# Altium PCB OldMCUBoard.PcbDoc
Units mm, origin at the board's own origin, x right, y up, seen from the top; angles counter-clockwise.
Board outline 47.6 x 56 mm, 2 copper layers (Top Layer, Bottom Layer); 55 components, 75 nets, 209 pads, 137 vias.
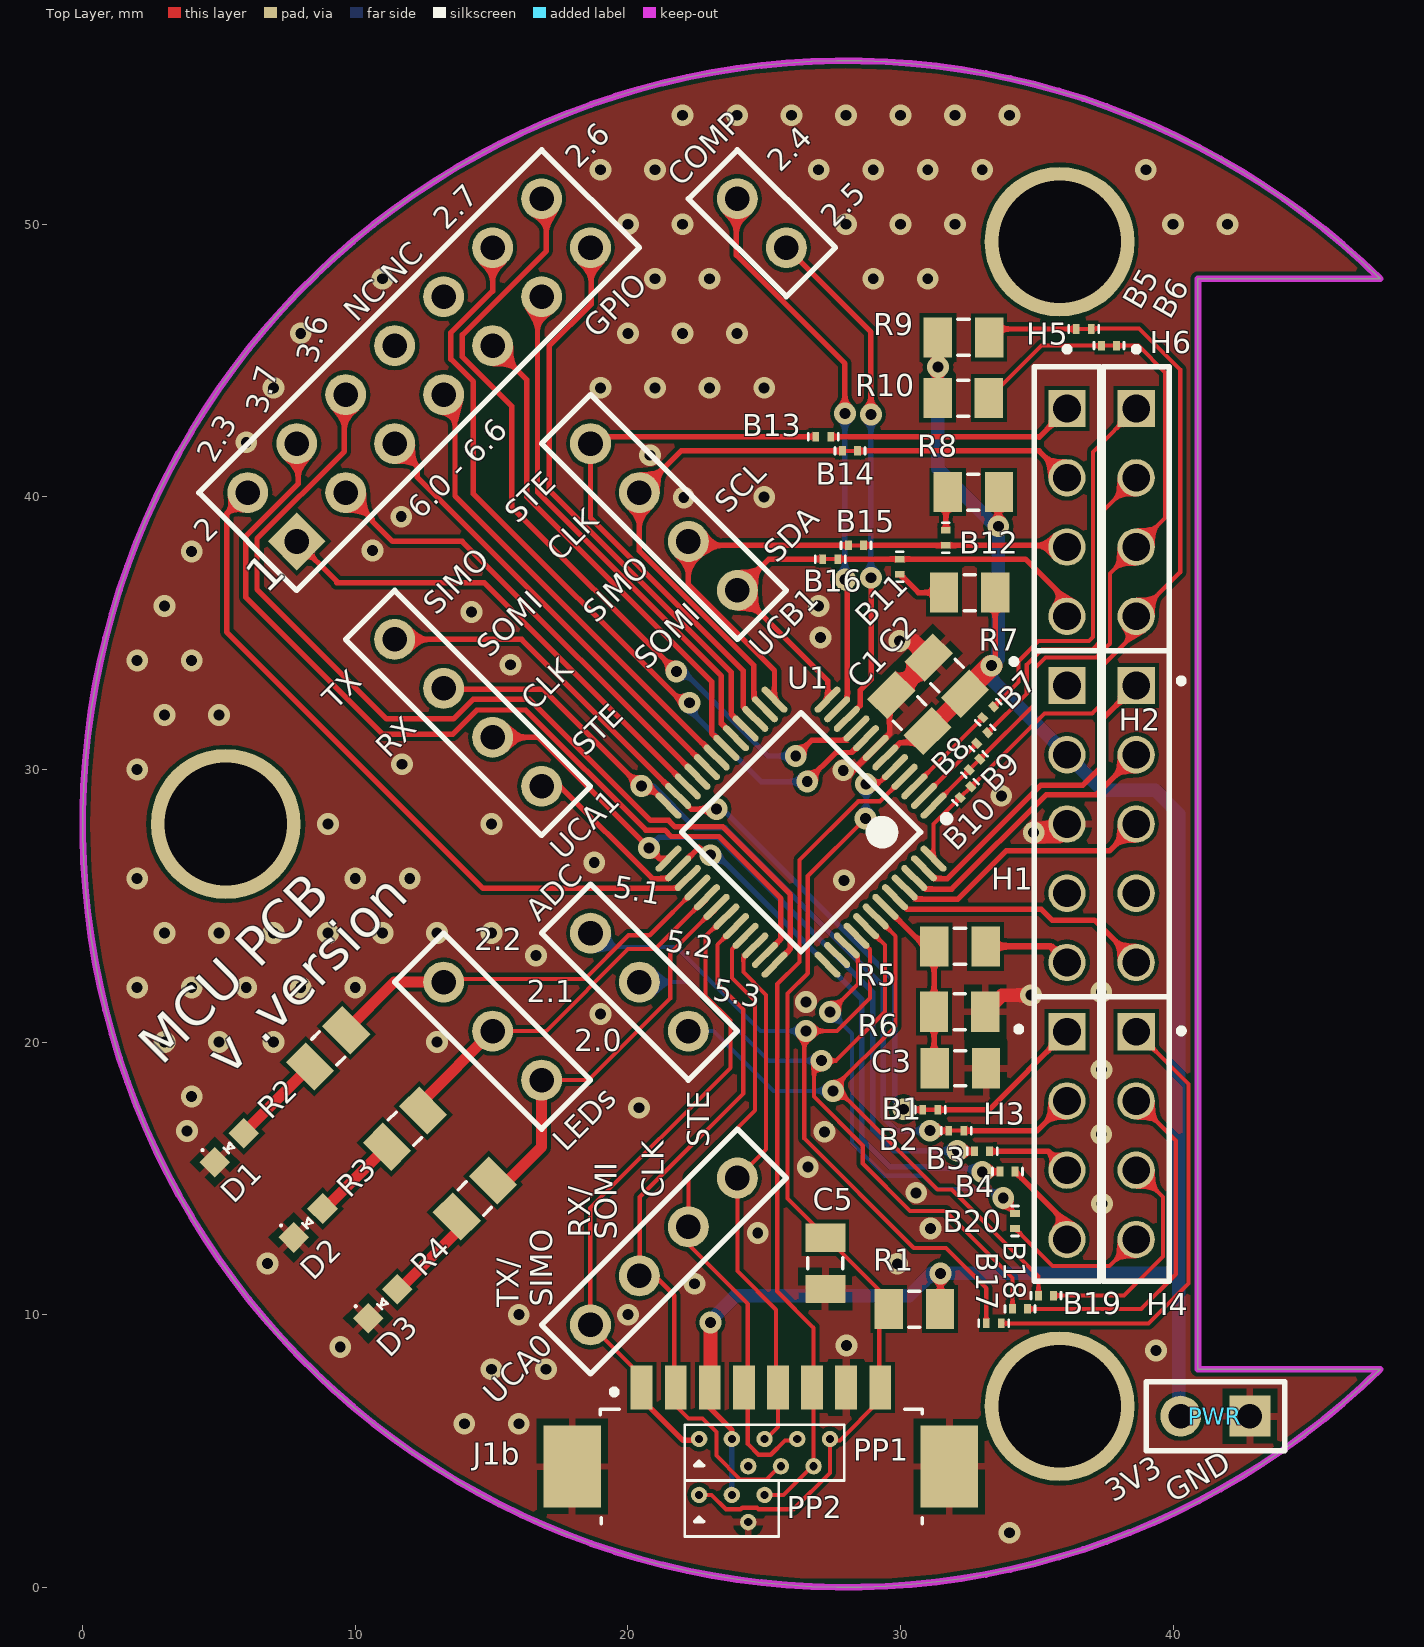
[diagram p0: Top Layer view]
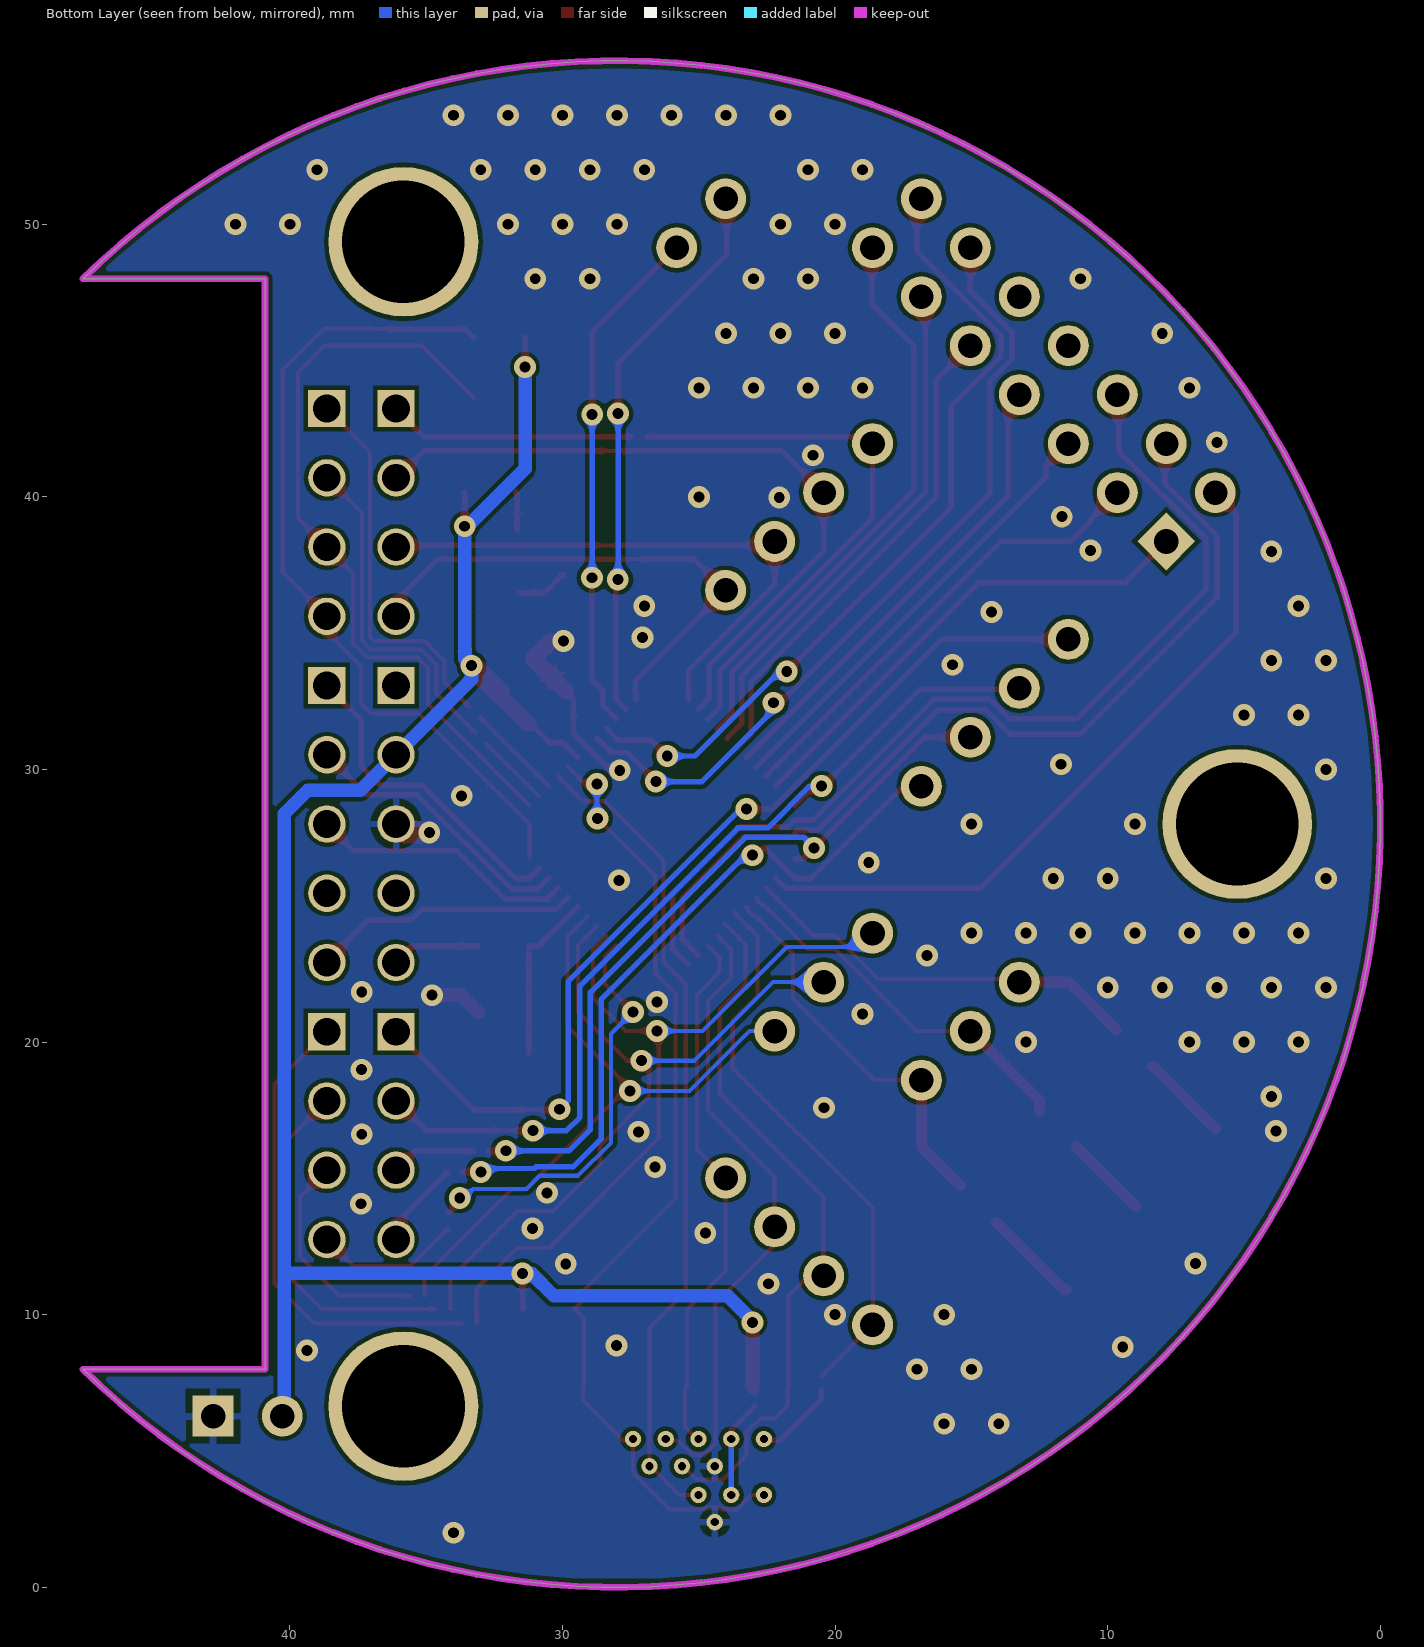
[diagram p1: Bottom Layer view, seen from below]

## Layer stack, top to bottom
Top Solder: solder mask 0.0102, Solder Resist, Dk 3.5
Top Layer: signal copper 0.0356
Dielectric 1: dielectric 0.32, FR-4, Dk 4.8
Bottom Layer: signal copper 0.0356
Bottom Solder: solder mask 0.0102, Solder Resist, Dk 3.5

## Board outline
47.596,8 cw(c28,28) 47.596,48 47.6,48 40.913,48 40.913,8

## Design rules (kind name [scope] priority, off if disabled: settings)
Clearance [All] p1: gap=0.152 ignorepadtopadclearanceinfootprint=FALSE except(0: Arc-Hole Track-Hole SMDPad-Hole THPad-Hole Via-Hole Fill-Hole Poly-Hole Region-Hole Text-Hole)
HoleSize [All] p1: absolutevalues=TRUE maxlimit=6.2 minlimit=0.3 maxpercent=80.000 minpercent=20.000
MinimumAnnularRing [All] p1: minimumring=0.15
MinimumSolderMaskSliver [All] p1: minsoldermaskwidth=0.1
PolygonConnect ViaConnect [IsVia] p1: connectstyle=Direct reliefconductorwidth=0.254 reliefentries=4 polygonreliefangle="90 Angle" airgapwidth=0.254
PolygonConnect [All] p2: connectstyle=Relief reliefconductorwidth=0.254 reliefentries=4 polygonreliefangle="90 Angle" airgapwidth=0.254
RoutingVias [All] p1: holewidth=0.3 width=0.6 viastyle="Through Hole" minholewidth=0.3 minwidth=0.5 maxholewidth=1 maxwidth=5
SilkToSilkClearance [All] p1: silktosilkclearance=0.1
SilkToSolderMaskClearance [IsPad] p1: minsilkscreentomaskgap=0.1 clearancetoexposedcopper=TRUE
SolderMaskExpansion [All] p1: expansion=0.051 istentingtop=FALSE
Width [All] p1: maxlimit=25.4 minlimit=0.15 preferedwidth=0.3
26 further rules are at their usual default settings.

## Components (designator, comment, footprint, x,y, rotation, side; value= is the part's Value field where it differs from the comment)
ADC "Header 3" HDR1X3 22.222,20.403 r135 top
B1 "Solder Jumper Normally Closed 0201" "SOLDER BRIDGE CLOSED 0201" 31.089,17.517 r0 top net-tie
B2 "Solder Jumper Normally Closed 0201" "SOLDER BRIDGE CLOSED 0201" 32.044,16.75 r0 top net-tie
B3 "Solder Jumper Normally Open 0201" "SOLDER BRIDGE OPEN 0201" 32.995,15.99 r0 top
B4 "Solder Jumper Normally Open 0201" "SOLDER BRIDGE OPEN 0201" 33.929,15.253 r0 top
B5 "Solder Jumper Normally Closed 0201" "SOLDER BRIDGE CLOSED 0201" 36.726,46.158 r180 top net-tie
B6 "Solder Jumper Normally Closed 0201" "SOLDER BRIDGE CLOSED 0201" 37.652,45.547 r0 top net-tie
B7 "Solder Jumper Normally Open 0201" "SOLDER BRIDGE OPEN 0201" 33.217,32.101 r225 top
B8 "Solder Jumper Normally Open 0201" "SOLDER BRIDGE OPEN 0201" 32.998,31.153 r225 top
B9 "Solder Jumper Normally Closed 0201" "SOLDER BRIDGE CLOSED 0201" 32.714,30.183 r225 top net-tie
B10 "Solder Jumper Normally Closed 0201" "SOLDER BRIDGE CLOSED 0201" 32.385,29.169 r45 top net-tie
B11 "Solder Jumper Normally Open 0201" "SOLDER BRIDGE OPEN 0201" 29.979,37.438 r270 top
B12 "Solder Jumper Normally Open 0201" "SOLDER BRIDGE OPEN 0201" 31.668,38.5 r270 top
B13 "Solder Jumper Normally Open 0201" "SOLDER BRIDGE OPEN 0201" 27.168,42.21 r0 top
B14 "Solder Jumper Normally Closed 0201" "SOLDER BRIDGE CLOSED 0201" 28.147,41.684 r0 top net-tie
B15 "Solder Jumper Normally Closed 0201" "SOLDER BRIDGE CLOSED 0201" 28.372,38.222 r0 top net-tie
B16 "Solder Jumper Normally Closed 0201" "SOLDER BRIDGE CLOSED 0201" 27.425,37.72 r0 top net-tie
B17 "Solder Jumper Normally Open 0201" "SOLDER BRIDGE OPEN 0201" 33.423,9.683 r0 top
B18 "Solder Jumper Normally Open 0201" "SOLDER BRIDGE OPEN 0201" 34.388,10.212 r0 top
B19 "Solder Jumper Normally Open 0201" "SOLDER BRIDGE OPEN 0201" 35.341,10.703 r0 top
B20 "Solder Jumper Normally Open 0201" "SOLDER BRIDGE OPEN 0201" 34.202,13.437 r270 top
C1 "100nF" CAPACITOR_0805_2012M-70N 30.326,32.071 r315 top
C2 "22uF" CAPACITOR_0805_2012M-70N 31.705,33.443 r315 top
C3 "100nF" CAPACITOR_0805_2012M-70N 32.198,19.041 r180 top
C5 "1nF" CAPACITOR_0805_2012M-70N 27.242,11.884 r90 top
COMP "Header 2" HDR1X2#1 25.814,49.139 r135 top
D1 "LTST-C190 Series" LED_0603_1608M_0.80MM 5.382,16.124 r45 top
D2 "LTST-C190 Series" LED_0603_1608M_0.80MM 8.268,13.364 r45 top
D3 "LTST-C190 Series" LED_0603_1608M_0.80MM 11.005,10.398 r45 top
GPIO "Header 7X2" HDR2X7 7.853,38.363 r45 top locked
H1 "SSQ-105-03-S-S" SAMTEC_SSQ-105-03-S-S 36.107,28 r270 top
H2 "SSQ-105-03-S-S" SAMTEC_SSQ-105-03-S-S 38.647,28 r270 top
H3 "SSQ-104-02-S-S" *SAMTEC_SSQ-104-02-S-S_SSQ-104-02-S-S(Primary) 36.107,16.57 r270 top
H4 "SSQ-104-02-S-S" *SAMTEC_SSQ-104-02-S-S_SSQ-104-02-S-S(Primary) 38.647,16.57 r270 top
H5 "SSQ-104-02-S-S" *SAMTEC_SSQ-104-02-S-S_SSQ-104-02-S-S(Primary) 36.107,39.43 r270 top
H6 "SSQ-104-02-S-S" *SAMTEC_SSQ-104-02-S-S_SSQ-104-02-S-S(Primary) 38.647,39.43 r270 top
J1b "0532610871" MOLEX_0532610871 25.505,4.931 r0 top
LEDs "Header 3" HDR1X3 13.241,22.199 r315 top
PP1 "Headerless Pogo Holes 8-pin" POGO_8_PIN_HEADER 25.015,4.941 r0 top
PP2 "Headerless Pogo Holes 4-pin" POGO_4_PIN_HEADER 23.815,2.891 r0 top
PWR "" HDR1X2#2 42.82,6.278 r180 top
R1 "47k" RESISTOR_0805_2012M-50N 30.51,10.203 r0 top
R2 "1K" RESISTOR_0805_2012M-50N 9.005,19.772 r225 top value=1k
R3 "1K" RESISTOR_0805_2012M-50N 11.826,16.823 r225 top value=1k
R4 "1K" RESISTOR_0805_2012M-50N 14.386,14.263 r225 top value=1k
R5 "47k" RESISTOR_0805_2012M-50N 32.183,23.513 r0 top
R6 "47k" RESISTOR_0805_2012M-50N 32.169,21.113 r180 top
R7 "4.7k" RESISTOR_0805_2012M-50N 32.536,36.49 r0 top
R8 "4.7k" RESISTOR_0805_2012M-50N 32.672,40.174 r0 top
R9 "4.7k" RESISTOR_0805_2012M-50N 32.312,45.849 r180 top
R10 "4.7k" RESISTOR_0805_2012M-50N 32.304,43.624 r180 top
U1 "MSP430FR2355TPT" PT0048A_L 26.352,27.7 r225 top
UCA0 "Header 4" HDR1X4 24.018,15.014 r225 top
UCA1 "Header 4" HDR1X4 16.833,29.383 r135 top locked
UCB1 "Header 4" HDR1X4 18.63,41.955 r315 top

## Footprints (in the part's own frame and the unit in brackets; to place one, negate y for a bottom-side part, rotate by r counter-clockwise, add the part's x,y. Pads: shape width x height; smd on the part's side, far side on the other; paste and mask are expansions set on the pad)
*SAMTEC_SSQ-104-02-S-S_SSQ-104-02-S-S(Primary) [mm]
  rect 1.37x1.37 hole 1.02: 01(-3.81,0)
  round 1.37 hole 1.02: 02(-1.27,0) 03(1.27,0) 04(3.81,0)
  silkscreen extent -5.34,-1.87 5.34,1.2
CAPACITOR_0805_2012M-70N [mm] "Capacitor, 0805 (2012 metric), 0.7mm high, nominal pads,"
  rect 1.04x1.47 smd mask+0.051: 1(-0.94,0) 2(0.94,0)
  silkscreen extent -0.2,-0.63 0.2,0.63, body extent -1,-0.73 1,0.73, height 1.23
HDR1X2#1 [mm] "Connector; Header; 2 Position"
  round 1.5 hole 0.9: 1(0,0) 2(2.54,0)
  silkscreen extent -1.27,-1.27 3.81,1.27
HDR1X2#2 [mm] "Connector; Header; 2 Position"
  rect 1.5x1.5 hole 0.9: 1(0,0)
  round 1.5 hole 0.9: 2(2.54,0)
  silkscreen extent -1.27,-1.27 3.81,1.27
HDR1X3 [mm] "Connector; Header; 3 Position"
  round 1.5 hole 0.9: 1(0,0) 2(2.54,0) 3(5.08,0)
  silkscreen extent -1.27,-1.27 6.35,1.27
HDR1X4 [mm] "Connector; Header; 4 Position"
  round 1.5 hole 0.9: 1(0,0) 2(2.54,0) 3(5.08,0) 4(7.62,0)
  silkscreen extent -1.27,-1.27 8.89,1.27
HDR2X7 [mm] "Connector; Header; 7x2 Position"
  rect 1.5x1.5 hole 0.9: 1(0,0)
  round 1.5 hole 0.9: 2(0,2.54) 3(2.54,0) 4(2.54,2.54) 5(5.08,0) 6(5.08,2.54) 7(7.62,0) 8(7.62,2.54) 9(10.16,0) 10(10.16,2.54) 11(12.7,0) 12(12.7,2.54) 13(15.24,0) 14(15.24,2.54)
  silkscreen extent -1.27,-1.27 16.51,3.81
LED_0603_1608M_0.80MM [mm] "LED, 0603 (1608 metric), 0.8mm high"
  rect 0.8x0.8 smd mask+0.051: A(0.75,0) C(-0.75,0)
  silkscreen extent -0.79,-0.12 0.13,0.66, body extent -0.8,-0.4 0.8,0.4, height 0.8
MOLEX_0532610871 [mm] "Header - Picoblade 08-pin, SMT, RA, 3.4mm height"
  rect 0.8x1.6 smd mask+0.051: 1(-5,2.4) 2(-3.75,2.4) 3(-2.5,2.4) 4(-1.25,2.4) 5(0,2.4) 6(1.25,2.4) 7(2.5,2.4) 8(3.75,2.4)
  rect 2.1x3 smd mask+0.051: MP1(-7.55,-0.5) MP2(6.28,-0.5)
  silkscreen extent -6.52,-2.6 5.29,2.33
POGO_4_PIN_HEADER [mm] "4-pin header for pogo pins"
  round 0.6 hole 0.3 mask+0.051: 1(-1.2,0.5) 2(0,0.5) 3(0.6,-0.5) 4(1.2,0.5)
  silkscreen extent -1.73,-1.02 1.72,1.03
POGO_8_PIN_HEADER [mm] "8-pin header for pogo pins"
  round 0.6 hole 0.3 mask+0.051: 1(-2.4,0.5) 2(-1.2,0.5) 3(-0.6,-0.5) 4(0,0.5) 5(0.6,-0.5) 6(1.2,0.5) 7(1.8,-0.5) 8(2.4,0.5)
  silkscreen extent -2.93,-1.02 2.93,1.03
PT0048A_L [mm]
  oval 1.25x0.25 smd paste+0 mask+0.051: 1(-4.125,2.75) 2(-4.125,2.25) 3(-4.125,1.75) 4(-4.125,1.25) 5(-4.125,0.75) 6(-4.125,0.25) 7(-4.125,-0.25) 8(-4.125,-0.75) 9(-4.125,-1.25) 10(-4.125,-1.75) 11(-4.125,-2.25) 12(-4.125,-2.75) 25(4.125,-2.75) 26(4.125,-2.25) 27(4.125,-1.75) 28(4.125,-1.25) 29(4.125,-0.75) 30(4.125,-0.25) 31(4.125,0.25) 32(4.125,0.75) 33(4.125,1.25) 34(4.125,1.75) 35(4.125,2.25) 36(4.125,2.75)
  oval 0.25x1.25 smd paste+0 mask+0.051: 13(-2.75,-4.125) 14(-2.25,-4.125) 15(-1.75,-4.125) 16(-1.25,-4.125) 17(-0.75,-4.125) 18(-0.25,-4.125) 19(0.25,-4.125) 20(0.75,-4.125) 21(1.25,-4.125) 22(1.75,-4.125) 23(2.25,-4.125) 24(2.75,-4.125) 37(2.75,4.125) 38(2.25,4.125) 39(1.75,4.125) 40(1.25,4.125) 41(0.75,4.125) 42(0.25,4.125) 43(-0.25,4.125) 44(-0.75,4.125) 45(-1.25,4.125) 46(-1.75,4.125) 47(-2.25,4.125) 48(-2.75,4.125)
  silkscreen extent -4.25,-3.1 3.1,3.55, body extent -4.5,-4.5 4.5,4.5, height 1.6
RESISTOR_0805_2012M-50N [mm] "Resistor, 0805 (2012 metric), nominal pads"
  rect 1.04x1.47 smd mask+0.051: 1(-0.94,0) 2(0.94,0)
  silkscreen extent -0.2,-0.66 0.2,0.66, body extent -1,-0.63 1,0.62, height 0.5
SAMTEC_SSQ-105-03-S-S [mm]
  rect 1.37x1.37 / inner round 1.37 / far side rect 1.37x1.37 hole 1.02: 1(-5.08,0)
  round 1.37 hole 1.02: 2(-2.54,0) 3(0,0) 4(2.54,0) 5(5.08,0)
  silkscreen extent -6.36,-2.05 6.33,1.2, body extent -6.6,-1.21 6.6,1.21, height 8.51
"SOLDER BRIDGE CLOSED 0201" [mm]
  rect 0.25x0.35 smd paste-100 mask+0: 1(-0.275,0) 2(0.275,0)
  Top Layer lines w0.15: -0.225,0 0.225,0
  silkscreen extent -0.55,-0.13 0.55,0.13
"SOLDER BRIDGE OPEN 0201" [mm]
  rect 0.25x0.35 smd paste-100 mask+0: 1(-0.275,0) 2(0.275,0)
  silkscreen extent -0.55,-0.13 0.55,0.13

## Part data
ADC LEDs: "Header, 3-Pin"
C1 C3: library part "Generic Capacitor", "Generic Capacitor", Capacitance at Rated Voltage=40%, MF Part No.=C0805C104K5RAC7800, Package=0805, Rated Voltage=50V, Supplier 1 Part No.=399-C0805C104K5RAC7800CT-ND, Temperature Coefficient=X7R, Temp Range="-55°C ~ 125°C", Tolerance=±10%, Supplier 1=Digikey
C2: library part C0805C226M9PACTU, "Passive - Capacitor, X5R, 22uF Max, 6.3V, 0805 (2012 Metric), ±20%, -55°C ~ 85°C. 8.8uF @ 5V", Capacitance at Rated Voltage=30%, Package=0402, Rated Voltage=6.3V, Supplier 1 Part No.=399-C0805C226M9PAC7800CT-ND, Temperature Coefficient=X5R, Temp Range="-55°C ~ 85°C", Tolerance=±20%, APSS Standard Part="APSS Standard", MF Part No.=C0805C226M9PACTU, Supplier 1=Digikey
C5: library part "Generic Capacitor", "Generic Capacitor", Capacitance at Rated Voltage=100%, MF Part No.=399-C0805C102J5GAC7800CT-ND, Package=0805, Rated Voltage=50V, Temperature Coefficient=X7R, Temp Range="-55°C ~ 125°C", Tolerance=±5%, Supplier 1=Digikey, Supplier 1 Part No.=399-C0805C102J5GAC7800CT-ND
COMP: "Header, 2-Pin"
D1: "Diode - LED, 0603", Colour=Green, MF Part No.=LTST-C190KGKT, Package=0603, Rated Voltage="5V Reverse", Temp Range="-30°C ~ 85°C", APSS Standard Part="APSS Standard", Supplier 1=Digikey
D2: "Diode - LED, 0603", Colour=Yellow, MF Part No.=LTST-C190KSKT, Package=0603, Rated Voltage="5V Reverse", Temp Range="-30°C ~ 85°C", APSS Standard Part="APSS Standard", Supplier 1=Digikey
D3: "Diode - LED, 0603", Colour=Red, MF Part No.=LTST-C190KAKT, Package=0603, Rated Voltage="5V Reverse", Temp Range="-30°C ~ 85°C", APSS Standard Part="APSS Standard", Supplier 1=Digikey
GPIO: "Header, 7-Pin, Dual row"
J1b: "Header - Picoblade 08-pin, SMT, RA", Supplier 1 Part No.=WM7626CT-ND, APSS Standard Part="APSS Standard", MF Part No.=0532610871, Mounting Type="Surface Mount", Orientation="Right Angle", Pins=8, Pitch=1.25mm, Supplier 1=Digikey
PWR: library part "Header 2", "Header, 2-Pin"
R1 R6: library part "RMCF0805JT Series", "Passive - Resistor Series, 0805, 5%, 100m - 22M, E24, 0.063W, 1/16W, ±200ppm/°C, -55°C ~ 155°C, 0805 (2012 Metric)", MF Part No.=RMCF0805JT47K0, Package=0805, Power=1/8W, Rated Voltage=150V, Temp Range="-55°C ~ 155°C", Temperature Coefficient=±200ppm/°C, Tolerance=5%, Value Range="100m ~ 22M", APSS Standard Part="APSS Standard", E Series=E24, Supplier 1=Digikey
R2 R3 R4: library part "RMCF0805JT Series", "Passive - Resistor Series, 0805, 5%, 100m - 22M, E24, 0.063W, 1/16W, ±200ppm/°C, -55°C ~ 155°C, 0805 (2012 Metric)", MF Part No.=RMCF0805JT1K00, Package=0805, Power=1/8W, Rated Voltage=150V, Temperature Coefficient=±200ppm/°C, Temp Range="-55°C ~ 155°C", Tolerance=5%, Value Range="100m ~ 22M", APSS Standard Part="APSS Standard", E Series=E24, Supplier 1=Digikey
R5: library part "RMCF0805JT Series", "Passive - Resistor Series, 0805, 5%, 100m - 22M, E24, 0.063W, 1/16W, ±200ppm/°C, -55°C ~ 155°C, 0805 (2012 Metric)", MF Part No.=RMCF0805JT147K0, Package=0805, Power=1/8W, Rated Voltage=150V, Temp Range="-55°C ~ 155°C", Temperature Coefficient=±200ppm/°C, Tolerance=5%, Value Range="100m ~ 22M", APSS Standard Part="APSS Standard", E Series=E24, Supplier 1=Digikey
R7 R8 R9 R10: library part "RMCF0805JT Series", "Passive - Resistor Series, 0805, 5%, 100m - 22M, E24, 0.063W, 1/16W, ±200ppm/°C, -55°C ~ 155°C, 0805 (2012 Metric)", MF Part No.=RMCF0805JT4K70, Package=0805, Power=1/8W, Rated Voltage=150V, Temperature Coefficient=±200ppm/°C, Temp Range="-55°C ~ 155°C", Tolerance=5%, Value Range="100m ~ 22M", APSS Standard Part="APSS Standard", E Series=E24, Supplier 1=Digikey
U1: library part MSP430FR2355IPT, Package=LQFP-48, Rated Voltage="1.8V ~ 3.6V", Supplier 1 Part No.=296-50260-ND, Temp Range="-40°C ~ 105°C (TA)", MF Part No.=MSP430FR2355TPT, Supplier 1=Digikey
UCA0 UCA1 UCB1: "Header, 4-Pin"
B1 B2 B3 B4 B5 B6 B7 B8 B9 B10 B11 B12 B13 B14 B15 B16 B17 B18 B19 B20: DEBUG=DEBUG
H1 H2: MP=SSQ-105-03-S-S

## Free pads (board coordinates)
  round 5.5 hole 4.5: 1(5.25,28) 1(35.837,6.643) 1(35.837,49.357)

## Via types
v1: diameter 0.8, hole 0.4, Top Layer to Bottom Layer, tented both sides, 137 vias

## Nets (pads, with @x,y where several pads share a name; then routed paths per layer and width w, separated by ;. In a path a pad name is that pad's centre, name@x,y a point inside that pad or via, vN(x,y) a via of type N, cw(c..) or ccw(c..) an arc to the next point about the centre after c; other vN are vias at no path point)
1V8: H1.1
1V8_EN: H2.3 U1.45 | length 9.8
  Top Layer w0.2: U1.45 30.574,25.246 32.102,25.246 33.874,27.018 37.665,27.018 H2.3
1V8_PG: H2.1 U1.47 | length 11.9
  Top Layer w0.2: U1.47 31.237,25.997 31.723,25.997 35.15,29.424 36.689,29.424 37.382,30.118 37.382,31.815 H2.1
3V3: C1.2 C2.2 H1.2 J1b.3 PP1.2 PP2.2 PWR.2 R1.2 R7.2 R8.2 R9.2 R10.2 U1.6 | length 81.8
  Top Layer w0.2: J1b.3@22.96,6.625 23.815,5.77 PP1.2@23.815,5.391 ; J1b.3@22.96,7.125 J1b.3 ; U1.6 29.993,30.988 30.472,30.988 C1.2@31.138,31.654 ; C1.2@31.141,31.668 C1.2@31.26,31.668 ; R10.2@31.354,43.624 R10.2@31.362,43.632 ; R9.2@31.362,45.849 R10.2@31.362,43.632 ; v1(31.373,44.764) 31.373,43.643 R10.2@31.362,43.632 ; R1.2@31.46,10.203 31.427,10.236 31.467,10.276 v1(31.467,11.515) ; v1@33.314,33.807 33.47,33.963 33.47,36.465 33.466,36.469 R7.2@33.486,36.49 ; v1(33.589,38.921) 33.589,40.141 R8.2@33.622,40.174
  Top Layer w0.5: J1b.3 23.032,7.357 v1(23.032,9.713)
  Top Layer w0.6: C1.2@31.26,31.668 C2.2
  Top Layer w0.8: C2.2@32.327,32.82 33.314,33.807 v1(33.342,33.807)
  Bottom Layer w0.2: PP2.2 PP1.2@23.815,5.391
  Bottom Layer w0.5: v1(23.032,9.713) 23.032,9.781 23.948,10.697 30.322,10.697 31.14,11.515 v1(31.467,11.515) 40.205,11.515 40.21,11.52 ; v1(31.373,44.764) 31.373,41.034 33.487,38.921 v1(33.589,38.921) 33.589,34.058 33.591,34.057 v1(33.342,33.807) 33.342,33.314 33.47,33.186 33.466,33.181 H1.2 37.412,29.235 39.35,29.235 40.21,28.375 40.21,11.52 ; PWR.2 40.21,6.348 40.21,11.52
3V3_EN: H2.4
3V3_PG: H2.2 U1.46 | length 10.4
  Top Layer w0.2: U1.46 30.917,25.61 31.875,25.61 35.338,29.072 37.179,29.072 H2.2
5V: H1.4
5V_EN: H2.5 U1.44 | length 9.8
  Top Layer w0.2: U1.44 30.247,24.866 35.168,24.866 35.56,24.474 37.116,24.474 H2.5@38.659,22.931
ADC9: ADC.1 B19.1 U1.42 | length 25
  Top Layer w0.153: U1.42 29.813,23.885 29.813,20.579 27.474,18.239 27.506,18.207 v1(27.529,18.207) 27.746,18.207 31.362,14.591 31.88,14.591 35.066,11.405 B19.1
  Bottom Layer w0.153: ADC.1 23.147,20.403 25.343,18.207 v1(27.529,18.207)
ADC10: ADC.2 B18.1 U1.41 | length 27.4
  Top Layer w0.153: U1.41 29.435,23.557 29.435,21.115 27.637,19.318 v1(27.102,19.318) 26.824,19.039 26.824,18.001 28.614,16.21 28.614,15.542 30.349,13.808 31.647,13.808 34.113,11.342 B18.1
  Bottom Layer w0.153: ADC.2 22.283,22.199 25.164,19.318 v1(27.102,19.318)
ADC11: ADC.3 B17.1 U1.40 | length 28.9
  Top Layer w0.153: U1.40 28.881,23.403 28.881,21.62 27.668,20.407 v1(26.537,20.407) 26.473,20.343 26.473,16.464 30.488,12.449 31.669,12.449 33.148,10.97 B17.1
  Bottom Layer w0.153: ADC.3 19.131,23.493 21.775,23.493 24.861,20.407 v1(26.537,20.407)
COMP1.0: COMP.1 U1.10 | length 19
  Top Layer w0.2: COMP.1 28.913,46.04 v1(28.913,43.02) ; U1.10 28.519,32.343 28.519,32.9 28.924,33.305 v1(28.924,37.034)
  Bottom Layer w0.2: v1@28.876,36.985 v1@28.913,37.023 ; v1(28.913,43.02) v1@28.913,37.023 ; v1(28.924,37.034) v1@28.913,37.023
COMP1.1: COMP.2 U1.11 | length 20.5
  Top Layer w0.2: COMP.2@23.978,50.898 23.978,48.869 27.961,44.886 v1(27.961,43.058) ; U1.11 28.055,32.586 28.055,36.889 v1(27.972,36.972)
  Bottom Layer w0.2: v1@27.961,36.972 v1(27.961,43.058)
GND: C1.1 C2.1 C3.1 C5.1 D1.C D2.C D3.C H1.3 J1b.7 J1b.MP1 J1b.MP2 PP1.3 PP2.3 PWR.1 R6.1 U1.7 | length 10.6
  Top Layer w0.2: v1(27.9,29.97) 27.9,29.836 28.017,29.719 U1.7 29.599,31.301 29.599,32.581 C1.1@29.905,32.887
  Top Layer w0.5: R6.1@33.078,21.073 33.726,21.721 v1(34.792,21.721)
  Top Layer w0.6: C1.1@29.905,32.887 31.083,34.065 30.436,34.712 v1(29.964,34.712)
  Top Layer w0.8: v1(34.887,27.685) 35.792,27.685 H1.3
  other v1: 34,2 14,6 16,6 15,8 17,8 39.373,8.687 9.451,8.82 28.015,8.873 16,10 20,10 22.444,11.135 6.781,11.873 29.884,11.866 24.763,12.996 31.099,13.157 37.388,14.068 30.575,14.471 26.602,15.418 37.365,16.618 27.21,16.708 3.83,16.738 20.406,17.591 4,18 37.376,18.987 3,20 5,20 7,20 13,20 18.992,21.031 26.535,21.468 37.365,21.841 2,22 4,22 6,22 8,22 10,22 16.634,23.175 3,24 5,24 7,24 9,24 11,24 13,24 15,24 27.932,25.934 2,26 10,26 12,26 18.767,26.591 9,28 15,28 33.7,29.034 2,30 11.711,30.19 3,32 5,32 15.697,33.841 2,34 4,34 27.067,34.843 14.269,35.775 3,36 27,36 4,38 10.628,38.033 11.685,39.274 22.051,39.981 25,40 20.811,41.528 6,42 7,44 19,44 21,44 23,44 25,44 8,46 20,46 22,46 24,46 11,48 21,48 23,48 29,48 31,48 20,50 22,50 28,50 30,50 32,50 40,50 42,50 19,52 21,52 27,52 29,52 31,52 33,52 39,52 22,54 24,54 26,54 28,54 30,54 32,54 34,54
GPIO2.3: GPIO.2 U1.27 | length 26.4
  Top Layer w0.2: GPIO.2@6.044,40.139 5.284,39.379 5.284,35.051 14.693,25.643 21.819,25.643 U1.27
GPIO2.6: GPIO.14 U1.9 | length 30.3
  Top Layer w0.2: GPIO.14 17.014,50.755 17.014,49.026 13.928,45.94 13.928,45.135 15.734,43.328 15.734,39.635 v1(21.777,33.593) ; v1(26.159,30.494) 26.737,31.072 27.955,31.072 U1.9
  Bottom Layer w0.2: v1(21.777,33.593) 22.042,33.593 25.141,30.494 v1(26.159,30.494)
GPIO2.7: GPIO.12 U1.8 | length 29.6
  Top Layer w0.2: GPIO.12 15.037,47.548 13.511,46.021 13.511,45.053 14.333,44.231 14.333,40.114 21.999,32.448 v1(22.264,32.448) ; v1(26.578,29.555) 26.578,29.571 27.63,30.622 28.213,30.622 U1.8
  Bottom Layer w0.2: v1(22.264,32.448) 22.264,32.175 24.884,29.555 v1(26.578,29.555)
GPIO3.4: U1.38
GPIO3.5: U1.37
GPIO3.6: GPIO.6 U1.36 | length 36.1
  Top Layer w0.2: GPIO.6@9.6,43.716 9.6,41.668 6.396,38.464 6.396,36.607 11.149,31.853 13.603,31.853 14.333,32.584 16.38,32.584 20.834,28.13 21.5,28.13 21.735,27.895 23.483,27.895 25.964,25.414 25.964,23.423 U1.36
GPIO3.7: GPIO.4 U1.35 | length 33.6
  Top Layer w0.2: GPIO.4@7.907,41.911 7.907,40.477 5.982,38.552 5.982,36.324 11.015,31.292 13.572,31.292 14.461,32.181 16.252,32.181 20.656,27.777 21.354,27.777 21.589,27.542 23.337,27.542 25.611,25.268 25.611,23.778 U1.35
GPIO5.4: B20.1 U1.39 | length 15.3
  Top Layer w0.153: v1(27.42,21.109) 28.439,22.128 28.439,23.138 U1.39 ; v1(33.77,14.277) 33.77,14.144 B20.1
  Bottom Layer w0.153: v1(27.42,21.109) 28.225,20.305 28.225,16.305 29.43,15.1 30.836,15.1 31.326,14.61 33.28,14.61 33.601,14.289 v1@33.76,14.289
GPIO6.0: GPIO.1 U1.22 | length 18.1
  Top Layer w0.2: GPIO.1 9.326,36.89 9.326,36.851 14.727,36.851 U1.22
GPIO6.1: GPIO.3 U1.21 | length 17.3
  Top Layer w0.2: GPIO.3 10.631,39.177 10.631,39.102 11.369,38.364 13.92,38.364 U1.21
GPIO6.2: GPIO.5 U1.20 | length 16.6
  Top Layer w0.2: GPIO.5 12.277,41.123 12.277,40.714 U1.20
GPIO6.3: GPIO.7 U1.19 | length 17.5
  Top Layer w0.2: GPIO.7 13.658,43.334 13.658,40.04 U1.19
GPIO6.4: GPIO.9 U1.18 | length 18.3
  Top Layer w0.2: GPIO.9 16.287,44.297 16.287,40.008 23.08,33.214 23.08,31.325 U1.18
GPIO6.5: GPIO.11 U1.17 | length 19.3
  Top Layer w0.2: GPIO.11 16.685,47.195 16.685,40.175 23.433,33.427 23.433,31.68 U1.17
GPIO6.6: GPIO.13 U1.16 | length 21.3
  Top Layer w0.2: GPIO.13 18.652,49.117 18.652,47.066 17.114,45.527 17.114,40.245 23.785,33.573 23.785,32.035 U1.16
JTAG_TEST/SBW_TCK: J1b.6 PP1.7 PP2.4 U1.4 | length 30.5
  Top Layer w0.152: PP2.4 25.715,3.391 26.815,4.491 26.815,9.519 25.48,10.853 25.48,22.127 26.292,22.939 26.292,26.673 28.453,28.834 29.253,28.834 U1.4
LED1: LEDs.1 R2.1 U1.28 | length 15
  Top Layer w0.153: LEDs.1@13.272,22.32 18.425,22.32 20.026,23.92 20.804,23.92 U1.28
  Top Layer w0.4: R2.1@9.677,20.444 11.432,22.199 LEDs.1
LED2: LEDs.2 R3.1 U1.29 | length 13.9
  Top Layer w0.153: LEDs.2@15.049,20.412 17.009,20.412 20.01,23.413 21.003,23.413 22.599,25.008 22.678,25.008 22.856,25.187 22.856,25.266 U1.29
  Top Layer w0.4: R3.1@12.498,17.495 12.498,17.863 LEDs.2
LED3: LEDs.3 R4.1 U1.30 | length 14.5
  Top Layer w0.153: LEDs.3 18.562,18.606 21.552,21.596 21.552,23.254 22.952,24.655 23.031,24.655 23.21,24.834 23.21,24.912 U1.30
  Top Layer w0.4: R4.1@15.421,14.735 16.833,16.148 LEDs.3@16.833,18.565
NetB1_2: B1.2 H3.01 | length 5.9
  Top Layer w0.2: B1.2 33.244,17.517 H3.01
NetB2_2: B2.2 H3.02 | length 4.2
  Top Layer w0.2: B2.2 35.017,16.75 H3.02
NetB3_2: B3.2 H3.03 | length 3.1
  Top Layer w0.2: B3.2 35.417,15.99 H3.03
NetB4_2: B4.2 H3.04 | length 3.3
  Top Layer w0.2: B4.2 H3.04@36.107,13.349
  Bottom Layer w0.2: H3.04 H3.04@36.107,13.349
NetB5_1: B5.1 B10.2 H6.04 | length 23.4
  Top Layer w0.15: B10.2 35.277,32.06 37.034,32.06 37.4,32.427 37.4,33.786 38.647,35.033 H6.04 40.262,37.235 40.262,44.667 38.756,46.173 B5.1@37.005,46.173
NetB5_2: B5.2 R9.1 | length 3.3
  Top Layer w0.2: R9.1@33.262,45.849 33.57,46.158 B5.2
NetB6_1: B6.1 R10.1 | length 4.9
  Top Layer w0.15: R10.1@33.254,43.624 35.177,45.547 B6.1
NetB6_2: B6.2 B9.1 H6.03 | length 20.3
  Top Layer w0.15: B9.1 34.938,32.407 34.938,33.718 35.323,34.103 37.173,34.103 37.683,34.613 37.683,37.196 H6.03 39.708,39.221 39.708,44.565 38.726,45.547 B6.2
NetB7_1: B7.1 H6.01 | length 14.2
  Top Layer w0.15: B7.1 34.331,33.215 34.331,33.969 35.069,34.708 36.912,34.708 37.058,34.853 37.058,41.651 H6.01
NetB8_1: B8.1 H6.02 | length 12.7
  Top Layer w0.15: B8.1 34.633,32.788 34.633,33.844 35.194,34.405 37.038,34.405 37.36,34.728 37.36,39.413 H6.02
NetB11_1: B11.1 B16.2 H5.04 | length 9.6
  Top Layer w0.2: B16.2 34.577,37.72 36.063,36.234 H5.04@36.063,35.636
NetB11_2: B11.2 R7.1 | length 1.9
  Top Layer w0.2: B11.2 30.652,36.49 R7.1@31.586,36.49
NetB12_1: B12.1 R8.1 | length 1.4
  Top Layer w0.2: B12.1 31.669,40.121 R8.1@31.722,40.174
NetB12_2: B12.2 B15.2 H5.03 | length 7.5
  Top Layer w0.2: B15.2 36.045,38.222 H5.03 H5.03@36.103,38.156
NetB13_2: B13.2 H5.01 | length 9
  Top Layer w0.2: B13.2@27.502,42.202 35.07,42.202 35.085,42.187 H5.01@36.116,43.218
NetB14_2: B14.2 H5.02 | length 8.1
  Top Layer w0.2: B14.2 35.09,41.684 H5.02@36.088,40.686
NetB17_2: B17.2 H4.01 | length 17.5
  Top Layer w0.15: B17.2 39.1,9.683 40.561,11.144 40.561,18.466 H4.01
NetB18_2: B18.2 H4.02 | length 12.9
  Top Layer w0.153: B18.2 38.83,10.212 40.098,11.481 40.098,16.389 H4.02
NetB19_2: B19.2 H4.03 | length 8.2
  Top Layer w0.15: B19.2 38.197,10.703 39.625,12.131 39.625,14.322 H4.03
NetB20_2: B20.2 H4.04 | length 5.4
  Top Layer w0.153: B20.2 35.58,11.784 37.671,11.784 H4.04
NetD1_A: D1.A R2.2 | length 3.2
  Top Layer w0.4: D1.A@6.051,16.817 R2.2@8.333,19.1
NetD2_A: D2.A R3.2 | length 3.1
  Top Layer w0.4: D2.A@8.966,13.97 11.147,16.151 R3.2@11.154,16.151
NetD3_A: D3.A R4.2 | length 3.6
  Top Layer w0.4: D3.A 11.614,10.929 R4.2@14.077,13.392
Reset/SBW_TDIO: C5.2 J1b.8 PP1.8 PP2.1 R1.1 U1.5 | length 36.6
  Top Layer w0.152: PP2.1 23.067,3.391 23.596,2.862 24.138,2.862 24.196,2.919 24.738,2.919 24.796,2.862 26.078,2.862 27.415,4.199 27.415,5.391 27.779,5.391 29.255,6.867 J1b.8 ; v1(28.714,28.206) 26.597,26.089 26.597,22.523 25.853,21.779 25.853,14.258 29.371,10.74 29.371,10.392 29.56,10.203 29.22,9.864 J1b.8@29.22,7.348 ; v1(28.74,29.463) 28.787,29.463 28.981,29.269 U1.5
  Bottom Layer w0.152: v1(28.714,28.206) 28.458,28.206 28.438,28.226 28.74,28.527 v1(28.74,29.463)
UCA0_CLK/JTAG_TMS: J1b.4 PP1.6 U1.33 UCA0.2 | length 23.3
  Top Layer w0.15: U1.33 23.82,23.401 23.82,22.349 24.665,21.504 24.665,17.499 22.22,15.054 22.22,12.573 24.399,10.394 24.399,5.26 24.796,4.863 25.241,4.863 25.769,5.391 PP1.6@26.215,5.391
UCA0_RX/MISO/JTAG_TDI: J1b.2 PP1.5 U1.32 UCA0.3 | length 26.2
  Top Layer w0.15: J1b.2@21.701,7.344 21.701,10.714 20.436,11.979 20.436,14.312 24.233,18.11 24.233,21.194 23.283,22.144 23.283,23.572 U1.32 U1.32@24.07,24.358 ; J1b.2 21.755,6.675 22.231,6.199 22.744,6.199 23.249,5.694 23.249,4.832 24.121,3.96 25.084,3.96 PP1.5@25.615,4.491
UCA0_STE/JTAG_TCK: J1b.5 PP1.4 U1.34 UCA0.1 | length 19.9
  Top Layer w0.15: U1.34 24.236,23.11 24.236,22.569 25.072,21.733 25.072,16.068 UCA0.1 24.018,11.597 25.433,10.182 J1b.5@25.433,7.371 ; PP1.4@25.015,5.391 25.505,5.881 J1b.5
UCA0_TX/MOSI/JTAG_TDO: J1b.1 PP1.1 U1.31 UCA0.4 | length 23.7
  Top Layer w0.15: J1b.1@20.505,7.75 UCA0.4 18.619,9.637 18.619,13.918 23.758,19.057 23.758,20.788 22.85,21.695 22.85,23.888 U1.31@23.716,24.753
  Top Layer w0.2: J1b.1@20.505,7.25 20.505,6.915 22.03,5.391 PP1.1@22.615,5.391
UCA1_CLK: B3.1 U1.25 UCA1.2 | length 28.1
  Top Layer w0.2: UCA1.2 16.725,31.179 v1(20.779,27.125) 21.176,26.728 U1.25 ; v1@32.107,15.99 B3.1
  Bottom Layer w0.2: v1(20.779,27.125) 20.779,27.145 21.143,27.509 23.297,27.509 28.983,21.823 28.983,16.787 29.76,16.01 32.076,16.01 v1(32.081,16.016) v1@32.107,15.99
UCA1_RX/MISO: B2.1 U1.24 UCA1.3 | length 29.4
  Top Layer w0.2: UCA1.3 13.278,32.938 16.897,32.938 20.445,29.39 v1(20.499,29.39) 20.773,29.39 U1.24 ; v1(31.084,16.75) B2.1
  Bottom Layer w0.2: v1(20.499,29.39) 20.938,29.39 22.466,27.861 23.566,27.861 29.363,22.065 29.363,17.242 29.854,16.75 v1(31.084,16.75)
UCA1_STE: B4.1 U1.26 UCA1.1 | length 26.8
  Top Layer w0.2: UCA1.1 17.514,29.383 20.9,25.997 21.466,25.997 U1.26 22.609,27.14 23.027,26.722 v1(23.027,26.857) ; v1@33.012,15.253 B4.1
  Bottom Layer w0.2: v1(23.027,26.857) 23.292,26.857 28.583,21.565 28.583,16.448 29.603,15.429 30.972,15.429 31.037,15.363 32.873,15.363 v1(32.998,15.239) v1@33.012,15.253
UCA1_TX/MOSI: B1.1 U1.23 UCA1.4 | length 29.1
  Top Layer w0.2: UCA1.4 16.099,34.771 U1.23 22.323,28.547 v1(23.249,28.547) ; v1@30.132,17.517 B1.1
  Bottom Layer w0.2: v1(23.249,28.547) 23.466,28.547 29.794,22.22 29.794,17.855 v1(30.114,17.535) v1@30.132,17.517
UCB0_CLK: B8.2 U1.2 | length 2.7
  Top Layer w0.15: U1.2 30.872,29.026 B8.2
UCB0_SCL/MISO: B10.1 U1.48 | length 2.7
  Top Layer w0.15: U1.48 31.213,28.002 31.218,28.002 B10.1
UCB0_SDA/MOSI: B9.2 U1.1 | length 1.9
  Top Layer w0.15: U1.1 32.519,29.979 B9.2
UCB0_STE: B7.2 U1.3 | length 3.6
  Top Layer w0.15: U1.3 30.506,29.39 B7.2
UCB1_CLK: B14.1 U1.14 UCB1.2 | length 17.9
  Top Layer w0.2: U1.14 24.625,32.61 24.625,33.816 20.426,38.015 UCB1.2 21.95,41.684 B14.1
UCB1_MISO/SCL: B16.1 U1.12 UCB1.4 | length 9
  Top Layer w0.2: B16.1 25.17,37.72 UCB1.4 27.324,33.261 U1.12
UCB1_MOSI/SDA: B15.1 U1.13 UCB1.3 | length 13
  Top Layer w0.2: U1.13 25.379,33.627 22.222,36.785 UCB1.3 22.363,38.221 B15.1@28.102,38.221
UCB1_STE: B13.1 U1.15 UCB1.1 | length 21
  Top Layer w0.2: U1.15 24.227,32.3 24.227,33.63 18.63,39.227 UCB1.1 18.884,42.21 B13.1
Vbat: H1.5 R5.2 | length 3.2
  Top Layer w0.25: R5.2@33.133,23.513 35.514,23.513 H1.5
Vbat/2: C3.2 R5.1 R6.2 U1.43 | length 6.3
  Top Layer w0.2: U1.43 30.893,23.513 31.233,23.513 C3.2@31.233,19.584
pads on no net: GPIO.8 GPIO.10

## Polygon pours and split planes (outlines as drawn)
GND on Bottom Layer "Bottom GND" (solid, remove dead copper, pour order 4): 2.24,57.31 48.405,57.31 48.405,7.322 41.411,0.329 4.425,0.329 0.154,4.6 0.154,50.269
GND on Top Layer "Top GND" (solid, remove dead copper, pour order 0): 10.509,54.221 36.122,57.31 49.46,46.95 41.351,46.95 41.467,8.897 49.46,8.897 37.623,0.329 15.622,0.329 0.094,15.856 0.094,35.024

## Keep-outs
Keep-Out Layer:
  the board outline again, w0.25

## Silkscreen, mask and mechanical layers (free items; w line width, h text height)
Top Overlay:
  text "2.6" at 18.182,51.998 h0.8 r45
  text "2.4" at 25.596,51.879 h0.8 r45
  text "2.5" at 27.55,49.831 h0.8 r45
  text "2.7" at 13.341,49.739 h0.8 r45
  text "NC NC" at 10.052,46.364 h0.8 r45
  text "3.6" at 8.594,44.85 h0.8 r75
  text "3.7" at 6.735,42.991 h0.8 r75
  text "2.3" at 4.824,41.201 h0.8 r60
  text "SCL" at 23.664,39.352 h0.8 r45
  text "6.0 - 6.6" at 12.399,39.141 h0.8 r45
  text "STE" at 15.958,38.983 h0.8 r45
  text "2" at 4.547,38.28 h0.8 r45
  text "CLK" at 17.499,37.581 h0.8 r45
  text "SDA" at 25.464,37.522 h0.8 r45
  text "SIMO" at 12.969,35.627 h0.8 r45
  text "SIMO" at 18.833,35.328 h0.8 r45
  text "SOMI" at 14.938,34.065 h0.8 r45
  text "SOMI" at 20.707,33.614 h0.8 r45
  text "TX" at 9.284,32.156 h0.8 r45
  text "CLK" at 16.57,32.113 h0.8 r45
  text "STE" at 18.437,30.442 h0.8 r45
  text "RX" at 11.23,30.381 h0.8 r45
  text "5.1" at 19.424,25.324 h0.8 r350
  text "2.2" at 14.358,23.365 h0.8
  text "5.2" at 21.341,23.349 h0.8 r350
  text "5.3" at 23.072,21.556 h0.8 r350
  text "2.1" at 16.282,21.455 h0.8
  text ".version" at 6.615,19.865 h1.4 r45
  text "2.0" at 18.036,19.655 h0.8
  text "MCU PCB" at 2.901,19.099 h1.4 r45
  text "v" at 5.386,18.713 h1.4 r45
  text "STE" at 22.984,16.149 h0.8 r90
  text "CLK" at 21.314,14.282 h0.8 r90
  text "RX/" at 18.619,12.818 h0.8 r90
  text "SOMI" at 19.599,12.751 h0.8 r90
  text "SIMO" at 17.234,10.295 h0.8 r90
  text "TX/" at 16.006,10.272 h0.8 r90
  text "3V3" at 37.814,3.109 h0.8 r30
  text "GND" at 40.011,3.075 h0.8 r30
Mechanical 1:
  text "Battery cutout" at 46.172,24.284 h1.52 r90
Mechanical 15:
  lines w0.254: 41.46,9.025 49.46,9.025 49.46,47.025 41.46,47.025 41.46,9.025

## Text inside footprints (layer, text, board x,y; h text height)
GPIO: Top Overlay "1" at 6.727,36.399 h1.27 r45